# Altium PCB PCB.PcbDoc
Units mil, origin at the board's own origin, x right, y up, seen from the top; angles counter-clockwise.
Board outline 909.45 x 450 mil, 2 copper layers (Top Layer, Bottom Layer); 8 components, 7 nets, 28 pads, 7 vias.
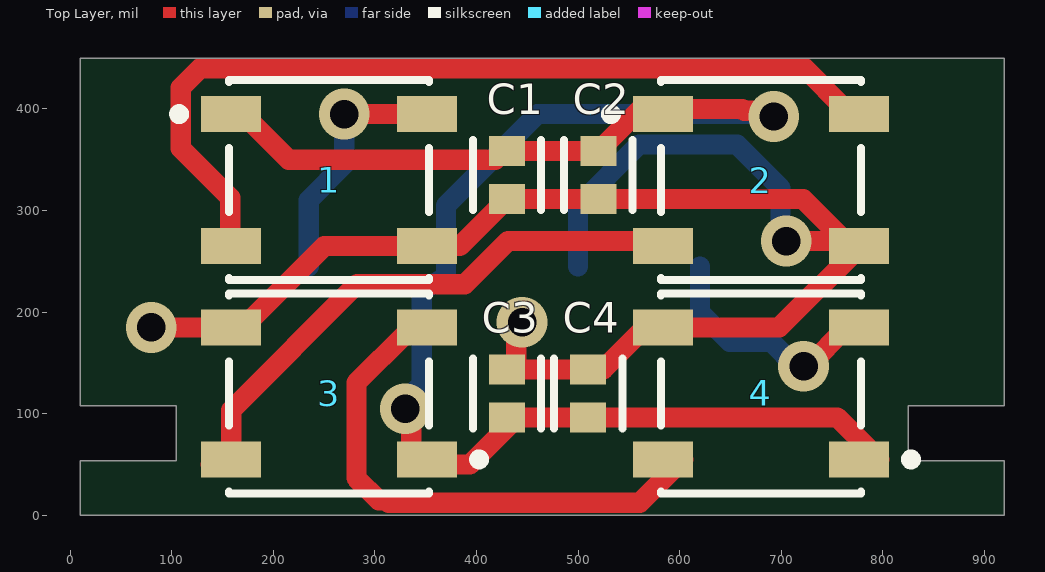
[diagram p0: Top Layer view]
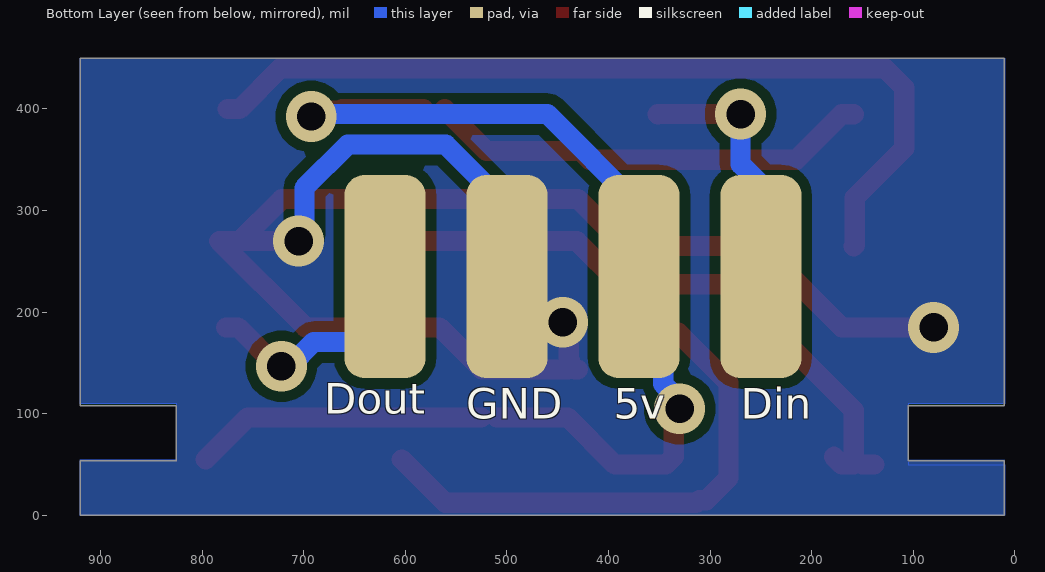
[diagram p1: Bottom Layer view, seen from below]
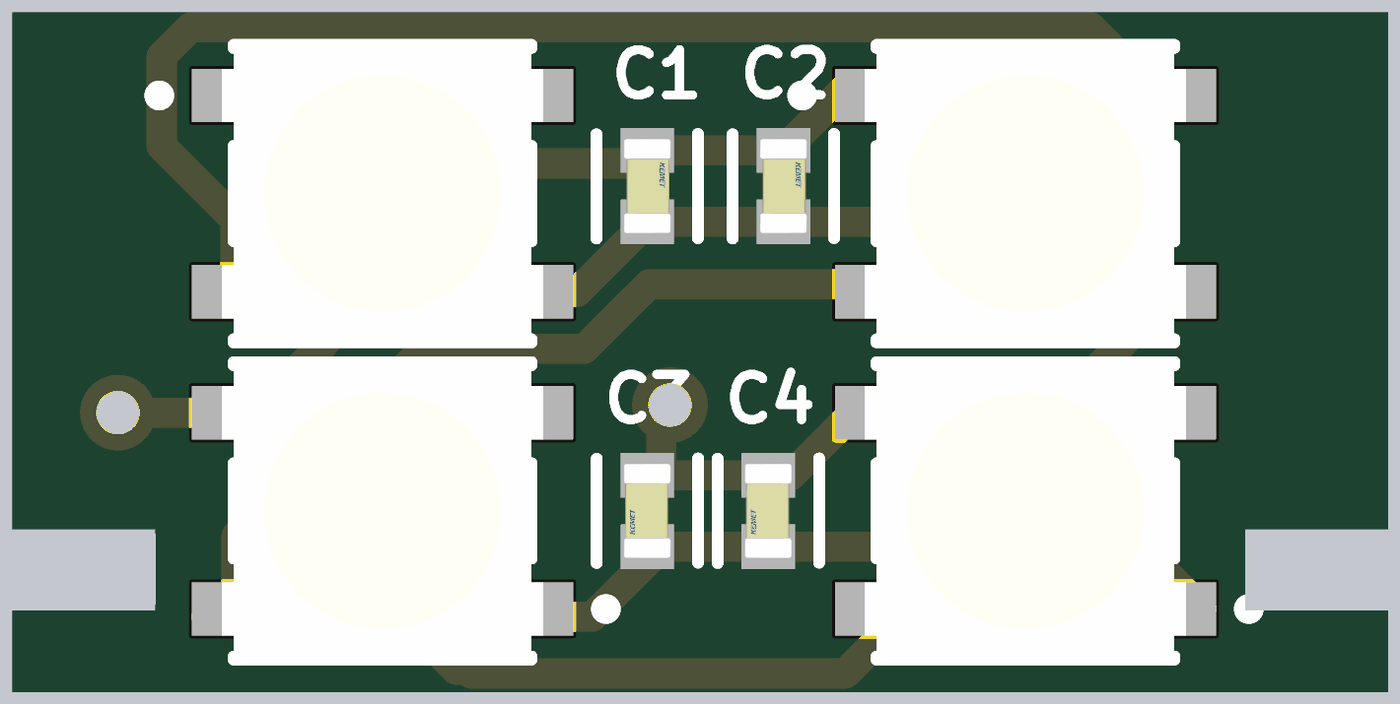
[diagram p2: 3D render of the assembled board from above, using the file's embedded part models]

## Layer stack, top to bottom
Top Solder: solder mask 0.4, Solder Resist, Dk 3.5
Top Layer: signal copper 1.4
Dielectric 1: dielectric 12.6, FR-4, Dk 4.8
Bottom Layer: signal copper 1.4
Bottom Solder: solder mask 0.4, Solder Resist, Dk 3.5

## Board outline
919.72,53.94 825.24,53.94 825.24,107.87 919.72,107.87 919.72,450 10.28,450 10.28,107.87 104.76,107.87 104.76,53.94 10.28,53.94 10.28,0 919.72,0

## Design rules (kind name [scope] priority, off if disabled: settings)
Clearance [All] p1: gap=10 ignorepadtopadclearanceinfootprint=FALSE except(0: Arc-Hole Track-Hole SMDPad-Hole THPad-Hole Via-Hole Fill-Hole Poly-Hole Region-Hole Text-Hole)
PolygonConnect [All] p1: connectstyle=Direct reliefconductorwidth=10 reliefentries=4 polygonreliefangle="90 Angle" airgapwidth=10
RoutingVias [All] p1: holewidth=28 width=50 viastyle="Through Hole" minholewidth=7.87 minwidth=23.62 maxholewidth=248.03 maxwidth=50
SolderMaskExpansion SolderMaskExpansion_Via [IsVia] p1: expansion=4 istentingtop=TRUE
SolderMaskExpansion [All] p2: expansion=1.97 istentingtop=FALSE
Width [All] p1: maxlimit=20 minlimit=5 preferedwidth=20
30 further rules are at their usual default settings.

## Components (designator, comment, footprint, x,y, rotation, side; value= is the part's Value field where it differs from the comment)
1 "1655" ADA-RGB-1655_V 255,330 r0 top
2 "1655" ADA-RGB-1655_V 680,330 r0 top
3 "1655" ADA-RGB-1655_V 255,120 r180 top
4 "1655" ADA-RGB-1655_V 680,120 r180 top
C1 "C0603C104K4RACTU" FP-C0603C-CF-MFG 430,335 r270 top value="0.10 μF"
C2 "C0603C104K4RACTU" FP-C0603C-CF-MFG 520,335 r270 top value="0.10 μF"
C3 "C0603C104K4RACTU" FP-C0603C-CF-MFG 430,120 r90 top value="0.10 μF"
C4 "C0603C104K4RACTU" FP-C0603C-CF-MFG 510,120 r90 top value="0.10 μF"

## Footprints (in the part's own frame and the unit in brackets; to place one, negate y for a bottom-side part, rotate by r counter-clockwise, add the part's x,y. Pads: shape width x height; smd on the part's side, far side on the other; paste and mask are expansions set on the pad)
ADA-RGB-1655_V [mm] "SMD, 4-Leads, Body 5x5mm"
  rect 1.5x0.9 smd: 1(-2.45,1.65) 2(-2.45,-1.65) 3(2.45,-1.65) 4(2.45,1.65)
  silkscreen extent -3.87,-2.5 2.5,2.5, body extent -2.7,-2.5 2.7,2.5, height 1.68
FP-C0603C-CF-MFG [mm]
  rect 0.75x0.9 smd paste+0 mask+0: 1(-0.6,0) 2(0.6,0)
  silkscreen extent -0.87,-0.85 0.88,0.85, body extent -1.2,-0.6 1.2,0.6, height 0.25

## Part data
1 2 3 4: library part CMP-2000-05026-1, "Intelligent Control LED Integrated Light Source, 3.5 to 5.3 V, -25 to 80 degC, 4-Pin SMD, RoHS, Tape and Reel", Color=Red,Green,Blue(RGB), Manufacturer=Adafruit-Industries-LLC, Package Description="4-Pin Surface Mount Device, Body 5 x 5 mm", Category=Optoelectronics, Configuration=Discrete, Controller Type=-, Datasheet URL=http://datasheet.octopart.com/ADA1655-Adafruit-Industries-datasheet-32028139.pdf, Datasheet Version=May-13, Family=Addressable,Specialty, Interface=-, Manufacturer URL=https://www.adafruit.com/, Mounting Type=SurfaceMount, Number of LEDs=10, Package Reference=1655, Series=Neopixel, Size / Dimension=5.00mmLx5.00mmW, Utilized LED=WS2812(5050)
C1 C2 C3 C4: library part CMP-2006-03811-3, "Capacitor; Ceramic; Cap; .100uF; Tol 10%; SMT; Vol-Rtg 16V; X7R; Tape and Reel", Capacitance="0.10 μF", Manufacturer=KEMET, Package=C0603C-CF, Temperature="-55°C to +125°C", Temperature Characteristic=X7R, Temperature Coefficient=30ppm/°C, Temperature Range High=+125°C, Temperature Range Low=-55°C, Tolerance=0.1, Voltage Rating="16 V", Automotive=Yes, Automotive Grade="Grade 1", Category=Cap, ComponentLink2Description=Datasheet, ComponentLink2URL=https://api.kemet.com/component-edge/download/datasheet/C0603C100J5GACAUTO.pdf, Device Class L1="Passive Components", Device Class L2=Capacitors, Device Class L3="Ceramic Capacitors", Digikey Description="Capacitor; Ceramic; Cap; .100uF; Tol 10%; SMT; Vol-Rtg 16V; X7R; Tape and Reel", Height=0.87mm, Lead Free=Yes, Manufacturer Part Number=C0603C104K4RACTU, Material=Ceramic, Mouser Description="Multilayer Ceramic Capacitors MLCC - SMD/SMT 16volts 0.1uF 10% X7R 10%", Octopart=https://octopart.com/c0603c104k4ractu-kemet-93067, RoHS=TRUE

## Free pads (board coordinates)
  rrect50% 80x200 smd far side: 2(250,235) 2(370,235) 2(500,235) 2(620,235)

## Via types
v1: diameter 50, hole 28, Top Layer to Bottom Layer, tented both sides, 7 vias

## Nets (pads, with @x,y where several pads share a name; then routed paths per layer and width w, separated by ;. In a path a pad name is that pad's centre, name@x,y a point inside that pad or via, vN(x,y) a via of type N, cw(c..) or ccw(c..) an arc to the next point about the centre after c; other vN are vias at no path point)
+5: 1.1 2.1 3.1 4.1 C1.1 C2.1 C3.1 C4.1 pad.2@370,235 | length 1671.7
  Top Layer w20: 1.1 170.35,394.96 215.31,350 418.43,350 427.05,358.62 C1.1 C2.1 2.1@561.3,399.92 ; v1(330,105) 335.74,99.26 335.74,57.76 343.46,50.04 393.66,50.04 440,96.38 C4.1 ; C4.1@525,96.38 755.12,96.38 4.1@796.46,55.04 ; 2.1@582.09,399.92 661.96,399.92 663.54,398.34 686.86,398.34 v1(692.6,392.6)
  Bottom Layer w20: v1(330,105) 330,113.12 346.17,129.29 346.17,221.17 370,235 370,305 460,395 690.21,395 v1(692.6,392.6)
DIN: 1.4 pad.2@250,235 | length 254.1
  Top Layer w20: v1(270,395) 351.42,395 1.4
  Bottom Layer w20: pad.2@235,245 235,310.41 270,345.41 v1(270,395) v1@275.74,389.26
DOUT: 4.2 pad.2@620,235 | length 247.5
  Top Layer w20: v1(722,146.8) 726.49,146.8 764.64,184.96 4.2
  Bottom Layer w20: pad.2@620,245 620,199.92 649.24,170.68 690,170.68 713.88,146.8 v1(722,146.8) v1@716.26,152.54
GND: 1.3 2.3 3.3 4.3 C1.2 C2.2 C3.2 C4.2 pad.2@500,235 | length 1637.5
  Top Layer w20: v1(80,185) 155.85,184.98 170.4,185 216.16,230.76 216.16,231.16 250.08,265.08 383.7,265.08 C1.2 C2.2 721.81,311.38 2.3@763.19,270 ; C3.2 432.95,143.62 437.72,148.39 437.72,151.34 439.26,152.88 439.26,184.26 v1(445,190) ; C3.2@440,143.62 C4.2 525,143.62 566.34,184.96 698.15,184.96 783.19,270 775,270 2.3@763.19,270 ; v1(705,270) 2.3@763.19,270
  Bottom Layer w20: pad.2@500,245 500,305 560,365 656.57,365 699.26,322.31 699.26,275.74 v1(705,270)
Net1_2: 1.2 2.4 | length 866.9
  Top Layer w20: 1.2 157.64,265.95 157.64,312.76 109.02,361.38 109.02,420.96 128.06,440 723.11,440 763.19,399.92 2.4@775,399.92
Net2_2: 2.2 3.4 | length 600.5
  Top Layer w20: 3.4@138.54,50.04 3.4@150.36,50.04 ; 3.4@178.07,57.76 170.36,50.04 158.54,50.04 158.54,103.54 282.36,227.36 388.41,227.36 431.05,270 2.2@602.09,270
Net3_2: 3.2 4.4 | length 513.2
  Top Layer w20: 3.2@331.46,179.96 281.93,130.43 281.93,36.72 303.64,15 310.97,15 313.64,12.32 560.83,12.32 4.4@603.54,55.04

## Polygon pours and split planes (outlines as drawn)
GND on Bottom Layer "GND_L02_P002" (solid, pour order 2): 920,450 920,110 825,110 825,55 920,55 920,0 10,0 10,55 105,55 105,110 10,110 10,450
GND on Bottom Layer "GND_L02_P001" (solid, pour order 1): 10,450 10,110 105,110 105,50 10,50 10,0 920,0 920,55 825,55 825,110 920,110 920,450

## Silkscreen, mask and mechanical layers (free items; w line width, h text height)
Bottom Overlay:
  text "Dout" at 680,100 h30
  text "Din" at 270,95 h30
  text "5v" at 395,95 h30
  text "GND" at 540,95 h30
Mechanical 1:
  lines w47.24: -13.35,0 ccw(c10.28,0) 10.28,-23.62 ; -13.35,0 ccw(c10.28,0) 10.28,-23.62 ; -13.35,0 -13.35,53.94 ; -13.35,53.94 cw(c10.28,53.94) 10.28,77.56 ; -13.35,53.94 cw(c10.28,53.94) 10.28,77.56 ; -13.35,107.87 ccw(c10.28,107.87) 10.28,84.25 ; -13.35,107.87 ccw(c10.28,107.87) 10.28,84.25 ; -13.35,107.87 -13.35,450 ; -13.35,450 cw(c10.28,450) 10.28,473.62 ; -13.35,450 cw(c10.28,450) 10.28,473.62 ; 10.28,-23.62 919.72,-23.62 ; 10.28,77.56 81.14,77.56 81.14,84.25 10.28,84.25 ; 10.28,473.62 919.72,473.62 ; 919.72,-23.62 ccw(c919.72,0) 943.35,0 ; 919.72,-23.62 ccw(c919.72,0) 943.35,0 ; 919.72,77.56 cw(c919.72,53.94) 943.35,53.94 ; 919.72,77.56 cw(c919.72,53.94) 943.35,53.94 ; 919.72,77.56 848.86,77.56 848.86,84.25 919.72,84.25 ; 919.72,84.25 ccw(c919.72,107.87) 943.35,107.87 ; 919.72,84.25 ccw(c919.72,107.87) 943.35,107.87 ; 919.72,473.62 cw(c919.72,450) 943.35,450 ; 919.72,473.62 cw(c919.72,450) 943.35,450 ; 943.35,0 943.35,53.94 ; 943.35,107.87 943.35,450